# Altium PCB BMW E34 Touring Bagage Light 41x180mm.PcbDoc
Units mm, origin at the board's own origin, x right, y up, seen from the top; angles counter-clockwise.
Board outline 180 x 41 mm, 2 copper layers (Top Layer, Bottom Layer), stack 0.325 mm thick; 65 components, 46 nets, 172 pads, 168 vias.
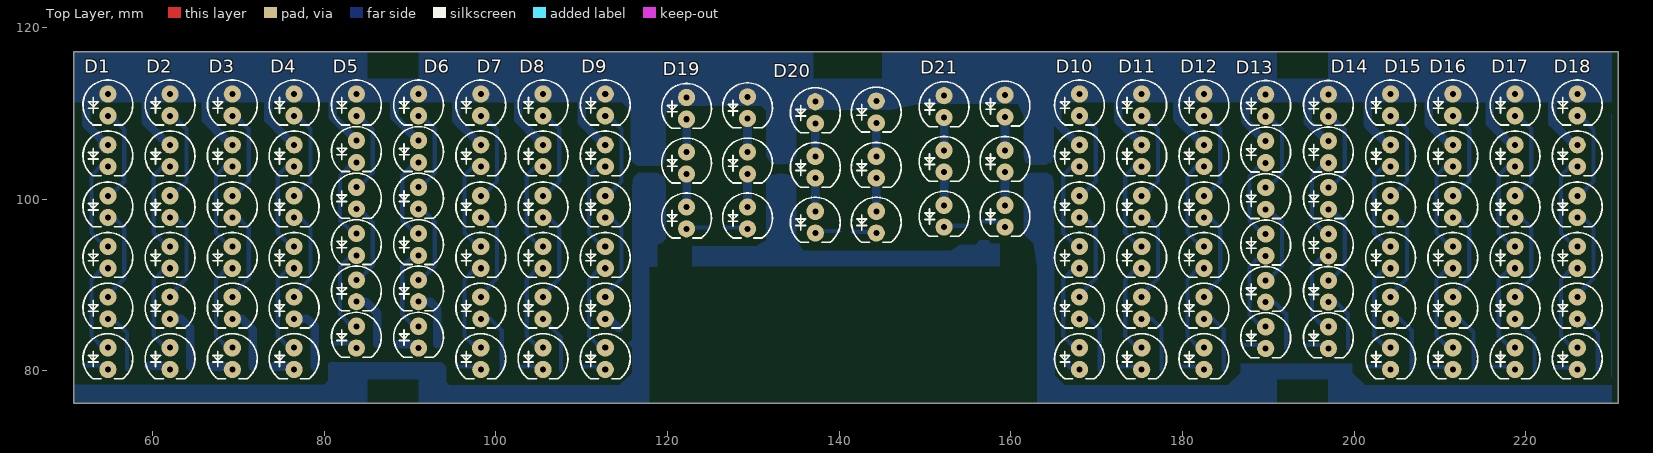
[diagram p0: Top Layer view]
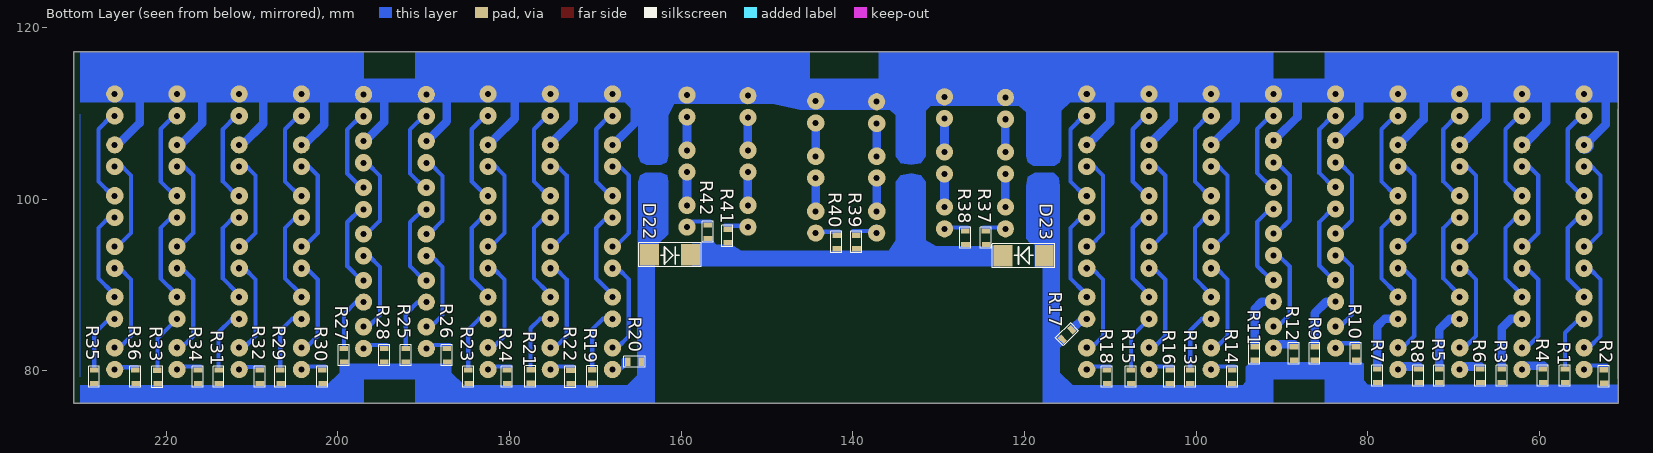
[diagram p1: Bottom Layer view, seen from below]

## Layer stack, top to bottom
Top Solder: solder mask 0.0102, Solder Resist, Dk 3.5
Top Layer: signal copper 0.0356
Dielectric 1: core 0.254, FR-4, Dk 4.2
Bottom Layer: signal copper 0.0356
Solder Side: solder mask 0.0102, Solder Resist, Dk 3.5

## Board outline
50.8,76.2 230.8,76.2 230.8,117.2 50.8,117.2

## Design rules (kind name [scope] priority, off if disabled: settings)
Clearance [All] p1: gap=0.5
ComponentClearance [All] p1: gap=0.001 collisioncheckmode=3 verticalgap=0.254 showdistances=FALSE
PolygonConnect [All] p1: connectstyle=Relief reliefconductorwidth=0.254 reliefentries=4 polygonreliefangle="90 Angle" airgapwidth=0.254
RoutingVias [All] p1: holewidth=0.7 width=2 viastyle="Through Hole" minholewidth=0.711 minwidth=1.27 maxholewidth=0.711 maxwidth=1.27
SolderMaskExpansion [All] p1: expansion=0.102
Width Width_lINES [(InNet('GND') OR InNet('VCC'))] p1 off: maxlimit=3 minlimit=0.1 preferedwidth=0.254 minimp=50.000000 maximp=50.000000 favimp=50.000000
Width [All] p2: maxlimit=2 minlimit=0.5 preferedwidth=1 minimp=50.000000 maximp=50.000000 favimp=50.000000
28 further rules are at their usual default settings.

## Components (designator, comment, footprint, x,y, rotation, side; value= is the part's Value field where it differs from the comment)
D1 "White" "LED Assembly Round 5mm White 6X 0.5mm" 54.8,112.25 r270 top
D2 "White" "LED Assembly Round 5mm White 6X 0.5mm" 62.05,112.25 r270 top
D3 "White" "LED Assembly Round 5mm White 6X 0.5mm" 69.3,112.25 r270 top
D4 "White" "LED Assembly Round 5mm White 6X 0.5mm" 76.5,112.25 r270 top
D5 "White" "LED Assembly Round 5mm White 6X" 83.75,112.25 r270 top
D6 "White" "LED Assembly Round 5mm White 6X" 91,112.25 r270 top
D7 "White" "LED Assembly Round 5mm White 6X 0.5mm" 98.25,112.25 r270 top
D8 "White" "LED Assembly Round 5mm White 6X 0.5mm" 105.5,112.25 r270 top
D9 "White" "LED Assembly Round 5mm White 6X 0.5mm" 112.75,112.25 r270 top
D10 "White" "LED Assembly Round 5mm White 6X 0.5mm" 168,112.25 r270 top
D11 "White" "LED Assembly Round 5mm White 6X 0.5mm" 175.25,112.25 r270 top
D12 "White" "LED Assembly Round 5mm White 6X 0.5mm" 182.5,112.25 r270 top
D13 "White" "LED Assembly Round 5mm White 6X" 189.7,112.2 r270 top
D14 "White" "LED Assembly Round 5mm White 6X" 197,112.2 r270 top
D15 "White" "LED Assembly Round 5mm White 6X 0.5mm" 204.25,112.25 r270 top
D16 "White" "LED Assembly Round 5mm White 6X 0.5mm" 211.5,112.25 r270 top
D17 "White" "LED Assembly Round 5mm White 6X 0.5mm" 218.75,112.25 r270 top
D18 "White" "LED Assembly Round 5mm White 6X 0.5mm" 226,112.25 r270 top
D19 "White" "LED Assembly Round 5mm White 2X3 1mm" 122.225,111.85 r0 top
D20 "White" "LED Assembly Round 5mm White 2X3 1mm" 137.225,111.35 r0 top
D21 "White" "LED Assembly Round 5mm White 2X3 1mm" 152.225,112.05 r0 top
D22 "S1M" DO-214AC 163.7,93.5 r180 bottom
D23 "S1M" DO-214AC 117.7,93.4 r0 bottom
R1 "160 Om" "SMD 0603 (1608)" 57.025,80.225 r270 bottom
R2 "160 Om" "SMD 0603 (1608)" 52.5,80.125 r270 bottom
R3 "160 Om" "SMD 0603 (1608)" 64.4,80.2 r270 bottom
R4 "160 Om" "SMD 0603 (1608)" 59.6,80.2 r270 bottom
R5 "160 Om" "SMD 0603 (1608)" 71.7,80.2 r270 bottom
R6 "160 Om" "SMD 0603 (1608)" 66.9,80.2 r270 bottom
R7 "160 Om" "SMD 0603 (1608)" 78.9,80.2 r270 bottom
R8 "160 Om" "SMD 0603 (1608)" 74.1,80.2 r270 bottom
R9 "160 Om" "SMD 0603 (1608)" 86.2,82.8 r270 bottom
R10 "160 Om" "SMD 0603 (1608)" 81.4,82.8 r270 bottom
R11 "160 Om" "SMD 0603 (1608)" 93.2,82.8 r270 bottom
R12 "160 Om" "SMD 0603 (1608)" 88.6,82.8 r270 bottom
R13 "160 Om" "SMD 0603 (1608)" 100.7,80.1 r270 bottom
R14 "160 Om" "SMD 0603 (1608)" 95.8,80.1 r270 bottom
R15 "160 Om" "SMD 0603 (1608)" 107.6,80.1 r270 bottom
R16 "160 Om" "SMD 0603 (1608)" 103.1,80.1 r270 bottom
R17 "160 Om" "SMD 0603 (1608)" 114.5,84.8 r315 bottom
R18 "160 Om" "SMD 0603 (1608)" 110.4,80.1 r270 bottom
R19 "160 Om" "SMD 0603 (1608)" 170.375,80.125 r270 bottom
R20 "160 Om" "SMD 0603 (1608)" 166.225,81.05 r180 bottom
R21 "160 Om" "SMD 0603 (1608)" 177.55,80.125 r270 bottom
R22 "160 Om" "SMD 0603 (1608)" 172.9,80.075 r270 bottom
R23 "160 Om" "SMD 0603 (1608)" 184.8,80.1 r270 bottom
R24 "160 Om" "SMD 0603 (1608)" 180.3,80.1 r270 bottom
R25 "160 Om" "SMD 0603 (1608)" 192.1,82.6 r270 bottom
R26 "160 Om" "SMD 0603 (1608)" 187.3,82.6 r270 bottom
R27 "160 Om" "SMD 0603 (1608)" 199.3,82.6 r270 bottom
R28 "160 Om" "SMD 0603 (1608)" 194.6,82.6 r270 bottom
R29 "160 Om" "SMD 0603 (1608)" 206.7,80.1 r270 bottom
R30 "160 Om" "SMD 0603 (1608)" 201.8,80.1 r270 bottom
R31 "160 Om" "SMD 0603 (1608)" 213.9,80.1 r270 bottom
R32 "160 Om" "SMD 0603 (1608)" 209.1,80.1 r270 bottom
R33 "160 Om" "SMD 0603 (1608)" 221.025,80.075 r270 bottom
R34 "160 Om" "SMD 0603 (1608)" 216.3,80.1 r270 bottom
R35 "160 Om" "SMD 0603 (1608)" 228.4,80.1 r270 bottom
R36 "160 Om" "SMD 0603 (1608)" 223.6,80.1 r270 bottom
R37 "160 Om" "SMD 0603 (1608)" 124.5,96.3 r270 bottom
R38 "160 Om" "SMD 0603 (1608)" 126.9,96.3 r270 bottom
R39 "160 Om" "SMD 0603 (1608)" 139.6,95.8 r270 bottom
R40 "160 Om" "SMD 0603 (1608)" 141.9,95.8 r270 bottom
R41 "160 Om" "SMD 0603 (1608)" 154.6,96.5 r270 bottom
R42 "160 Om" "SMD 0603 (1608)" 156.9,97 r270 bottom

## Footprints (in the part's own frame and the unit in brackets; to place one, negate y for a bottom-side part, rotate by r counter-clockwise, add the part's x,y. Pads: shape width x height; smd on the part's side, far side on the other; paste and mask are expansions set on the pad)
DO-214AC [mm]
  rect 2.2x2.5 smd: A(0,0) K(4.8,0)
  silkscreen extent -1.25,-1.4 6.05,1.4, body extent -0.42,-1.4 5.08,1.4, height 2.6
"LED Assembly Round 5mm White 2X3 1mm" [mm] "Assembly 2x3 in one line, distance 1mm"
  round 2 hole 0.7: A1(0,0) A2(7.1,0.08) K1(0,-15.3) K2(7.1,-15.3)
  Bottom Layer lines w0.5: 0,-12.76 0.24,-12.76 ; 0,-8.9 0.4,-8.9 ; 0,-6.36 0.24,-6.36 ; 0,-2.54 0.34,-2.54 ; 6.5,-8.9 7.1,-8.9 ; 6.56,-12.76 7.1,-12.76 ; 6.74,-2.46 7.1,-2.46 ; 6.76,-6.36 7.1,-6.36
  Bottom Layer lines w1: 0,-12.76 0,-8.9 ; 0,-6.36 0,-2.54 ; 7.1,-12.76 7.1,-8.9 ; 7.1,-6.36 7.1,-2.46
  silkscreen extent -2.9,-16.36 10,1.7, body extent -3.01,-16.47 10.11,1.79, height 9.31
"LED Assembly Round 5mm White 6X" [mm] "Assembly 6X in one line"
  round 2 hole 0.7: A1(0,0) A2(5.42,0) K1(24.2,0) K2(29.6,0)
  Bottom Layer lines w0.5: 27.06,0 27.06,-0.54 25.7,-1.9 20.1,-1.9 18.8,-0.6 18.8,0 ; 21.66,0 21.66,0.24 20,1.9 14.9,1.9 13.4,0.4 13.4,0 ; 16.26,0 16.26,-0.34 14.7,-1.9 9.5,-1.9 7.96,-0.36 7.96,0 ; 10.86,0 10.86,0.24 9.2,1.9 4.1,1.9 2.54,0.34 2.54,0
  silkscreen extent -1.62,-2.9 30.66,2.9, body extent -1.71,-3.01 30.77,3.01, height 9.31
"LED Assembly Round 5mm White 6X 0.5mm" [mm] "Assembly 6X in one line, distance 0.5mm"
  round 2 hole 0.7: A1(0,0) A2(5.92,0) K1(26.2,0) K2(32.1,0)
  Bottom Layer lines w0.5: 8.46,-0.36 8.46,0 ; 7.96,-0.36 9.5,-1.9 16.2,-1.9 17.76,-0.34 17.76,0 ; 29.56,0 29.56,-0.54 28.2,-1.9 21.6,-1.9 20.3,-0.6 20.3,0 ; 23.66,0 23.66,0.24 ; 14.4,0 14.4,0.4 ; 11.86,0 11.86,0.24 10.2,1.9 4.1,1.9 2.54,0.34 2.54,0 ; 23.16,0.24 21.5,1.9 15.6,1.9 14.1,0.4
  silkscreen extent -1.62,-2.9 33.16,2.9, body extent -1.71,-3.01 33.27,3.01, height 9.31
"SMD 0603 (1608)" [mm]
  rect 0.6x1 smd: 1(0,0) 2(1.575,0.025)
  silkscreen extent -0.45,-0.65 2.02,0.63, body extent 0.03,-0.4 1.58,0.45, height 0.45

## Part data
D1 D2 D3 D4 D5 D6 D7 D8 D9 D10 D11 D12 D13 D14 D15 D16 D17 D18 D19 D20 D21: library part "Led Assembly Round 5mm White 6X", "3.2-3.4v 25mA, 16-20cd"
D22 D23: library part "Diode S1M", "1 Amp General Purpose Rectifier"
R1 R2 R3 R4 R5 R6 R7 R8 R9 R10 R11 R12 R13 R14 R15 R16 R17 R18 R19 R20 R21 R22 R23 R24 R25 R26 R27 R28 R29 R30 R31 R32 R33 R34 R35 R36 R37 R38 R39 R40 R41 R42: library part "Res SMD 0603"

## Via types
v1: diameter 2, hole 0.7, Top Layer to Bottom Layer, 168 vias

## Nets (pads, with @x,y where several pads share a name; then routed paths per layer and width w, separated by ;. In a path a pad name is that pad's centre, name@x,y a point inside that pad or via, vN(x,y) a via of type N, cw(c..) or ccw(c..) an arc to the next point about the centre after c; other vN are vias at no path point)
GND: D22.K D23.K R37.2 R38.2 R39.2 R40.2 R41.2 R42.2
LEFTGND: D23.A R1.2 R2.2 R3.2 R4.2 R5.2 R6.2 R7.2 R8.2 R9.2 R10.2 R11.2 R12.2 R13.2 R14.2 R15.2 R16.2 R17.2 R18.2
NetD1_K1: D1.K1 R1.1 | length 6.5
  Bottom Layer w0.5: D1.K1@55.4,86.05 57.025,84.425 R1.1
NetD1_K2: D1.K2 R2.1 | length 2.6
  Bottom Layer w0.5: 52.2,80.625 D1.K2@54.8,80.625
NetD2_K1: D2.K1 R3.1 | length 7.3
  Bottom Layer w1: D2.K1 63.35,86.05 64.4,85 R3.1@64.4,80.5
NetD2_K2: D2.K2 R4.1 | length 2.4
  Bottom Layer w1: 59.5,80.6 D2.K2@61.9,80.6
NetD3_K1: D3.K1 R5.1 | length 7.2
  Bottom Layer w1: D3.K1 70.45,86.05 71.7,84.8 R5.1@71.7,80.5
NetD3_K2: D3.K2 R6.1 | length 2.3
  Bottom Layer w1: R6.1@66.9,80.5 D3.K2@69.25,80.5
NetD4_K1: D4.K1 R7.1 | length 7.5
  Bottom Layer w1: D4.K1 78.05,86.05 78.9,85.2 R7.1@78.9,80.5
NetD4_K2: D4.K2 R8.1 | length 2.4
  Bottom Layer w1: R8.1@74.1,80.5 D4.K2@76.45,80.5
NetD5_K1: D5.K1 R9.1 | length 6.6
  Bottom Layer w1: D5.K1 84.85,88.05 86.2,86.7 R9.1@86.2,83.1
NetD5_K2: D5.K2 R10.1 | length 2.8
  Bottom Layer w0.5: 81.1,83.2 D5.K2@83.9,83.2
NetD6_K1: D6.K1 R11.1 | length 6.7
  Bottom Layer w1: D6.K1 92.35,88.05 93.2,87.2 R11.1@93.2,83.1
NetD6_K2: D6.K2 R12.1 | length 2.3
  Bottom Layer w1: 88.6,83.1 D6.K2@90.85,83.1
NetD7_K1: D7.K1 R13.1 | length 7.6
  Bottom Layer w0.5: D7.K1 99.35,86.05 100.7,84.7 R13.1
NetD7_K2: D7.K2 R14.1 | length 2.9
  Bottom Layer w0.5: 95.5,80.5 96.2,80.5 97.9,80.5 D7.K2
NetD8_K1: D8.K1 R15.1 | length 6.8
  Bottom Layer w0.5: D8.K1 107.6,83.95 R15.1
NetD8_K2: D8.K2 R16.1 | length 2.8
  Bottom Layer w0.5: 102.8,80.5 103.5,80.5 105.15,80.5 D8.K2
NetD9_K1: D9.K1 R17.1 | length 1.6
  Bottom Layer w1: D9.K1@113.25,86.05 R17.1@114.35,84.95
NetD9_K2: D9.K2 R18.1 | length 2.8
  Bottom Layer w0.5: 110.1,80.5 110.8,80.5 112.4,80.5 D9.K2
NetD10_K1: D10.K1 R19.1 | length 7.6
  Bottom Layer w0.5: D10.K1 169.15,86.05 170.375,84.825 R19.1
NetD10_K2: D10.K2 R20.1 | length 2.2
  Bottom Layer w0.5: 166.7,81.3 166.7,80.575 167.125,80.15 D10.K2
NetD11_K1: D11.K1 R21.1 | length 7.6
  Bottom Layer w0.5: D11.K1 176.45,86.05 177.55,84.95 R21.1
NetD11_K2: D11.K2 R22.1 | length 2.8
  Bottom Layer w0.5: 172.6,80.5 173.325,80.5 174.9,80.5 D11.K2
NetD12_K1: D12.K1 R23.1 | length 7.5
  Bottom Layer w0.5: D12.K1 183.55,86.05 184.8,84.8 R23.1
NetD12_K2: D12.K2 R24.1 | length 2.7
  Bottom Layer w0.5: 179.9,80.5 180.7,80.5 182.15,80.5 D12.K2
NetD13_K1: D13.K1 R25.1 | length 7
  Bottom Layer w0.5: D13.K1 190.7,88 192.1,86.6 R25.1
NetD13_K2: D13.K2 R26.1 | length 2.4
  Bottom Layer w0.5: 187,83 D13.K2@189.4,83
NetD14_K1: D14.K1 R27.1 | length 6.9
  Bottom Layer w0.5: D14.K1 197.9,88 199.3,86.6 R27.1
NetD14_K2: D14.K2 R28.1 | length 2.4
  Bottom Layer w0.5: 194.3,83 D14.K2@196.7,83
NetD15_K1: D15.K1 R29.1 | length 7.6
  Bottom Layer w0.5: D15.K1 205.35,86.05 206.7,84.7 R29.1
NetD15_K2: D15.K2 R30.1 | length 2.9
  Bottom Layer w0.5: 201.5,80.5 202.2,80.5 203.9,80.5 D15.K2
NetD16_K1: D16.K1 R31.1 | length 7.4
  Bottom Layer w0.5: D16.K1 212.35,86.05 213.9,84.5 R31.1
NetD16_K2: D16.K2 R32.1 | length 2.8
  Bottom Layer w0.5: 208.85,80.45 211.1,80.45 211.45,80.1 D16.K2
NetD17_K1: D17.K1 R33.1 | length 6.9
  Bottom Layer w0.5: D17.K1 221.025,83.775 R33.1
NetD17_K2: D17.K2 R34.1 | length 2.9
  Bottom Layer w0.5: 216,80.5 216.7,80.5 218.4,80.5 D17.K2
NetD18_K1: D18.K1 R35.1 | length 7.3
  Bottom Layer w0.5: D18.K1 226.65,86.05 228.4,84.3 R35.1
NetD18_K2: D18.K2 R36.1 | length 2.7
  Bottom Layer w0.5: 223.4,80.4 223.9,80.4 225.75,80.4 D18.K2
NetD19_K1: D19.K1 R37.1 | length 2.6
  Bottom Layer w0.5: D19.K1 122.375,96.7 124.1,96.7 124.8,96.7
NetD19_K2: D19.K2 R38.1 | length 2.8
  Bottom Layer w0.5: 126.6,96.7 127.3,96.7 129.175,96.7 D19.K2
NetD20_K1: D20.K1 R39.1 | length 2.9
  Bottom Layer w0.5: D20.K1 137.475,96.3 139.1,96.3 140,96.3
  Bottom Layer w0.6: D20.K1@137.275,96.725 D20.K1@137.3,96.7
NetD20_K2: D20.K2 R40.1 | length 2.8
  Bottom Layer w0.5: 141.6,96.2 142.3,96.2 144.175,96.2 D20.K2
NetD21_K1: D21.K1 R41.1 | length 2.7
  Bottom Layer w0.5: D21.K1 152.375,96.9 154.2,96.9 154.9,96.9
NetD21_K2: D21.K2 R42.1 | length 3
  Bottom Layer w0.5: 156.6,97.4 157.3,97.4 158.675,97.4 D21.K2
RIGHTGND: D22.A R19.2 R20.2 R21.2 R22.2 R23.2 R24.2 R25.2 R26.2 R27.2 R28.2 R29.2 R30.2 R31.2 R32.2 R33.2 R34.2 R35.2 R36.2
VCC: D1.A1 D1.A2 D2.A1 D2.A2 D3.A1 D3.A2 D4.A1 D4.A2 D5.A1 D5.A2 D6.A1 D6.A2 D7.A1 D7.A2 D8.A1 D8.A2 D9.A1 D9.A2 D10.A1 D10.A2 D11.A1 D11.A2 D12.A1 D12.A2 D13.A1 D13.A2 D14.A1 D14.A2 D15.A1 D15.A2 D16.A1 D16.A2 D17.A1 D17.A2 D18.A1 D18.A2 D19.A1 D19.A2 D20.A1 D20.A2 D21.A1 D21.A2 | length 126.9
  Bottom Layer w1: 52.3,112.4 52.3,108.674 D1.A2@54.644,106.33 ; 59.2,112.7 59.2,108.974 D2.A2@61.544,106.63 ; 66.2,113 66.2,109.274 D3.A2@68.544,106.93 ; 73.5,113 73.5,109.274 D4.A2@75.844,106.93 ; 81,113.3 81,109.574 D5.A2@83.344,107.23 ; 88.2,113.3 88.2,109.574 D6.A2@90.544,107.23 ; 95.4,112.9 95.4,109.174 D7.A2@97.744,106.83 ; 102.6,113 102.6,109.274 D8.A2@104.944,106.93 ; 110,112.7 110,108.974 D9.A2@112.344,106.63 ; 165.4,112.6 165.4,108.874 D10.A2@167.744,106.53 ; 172.5,112.9 172.5,109.174 D11.A2@174.844,106.83 ; 179.4,113.1 179.4,109.374 181.744,107.03 ; 187.3,112.8 187.3,109.074 D13.A2@189.644,106.73 ; 194.6,112.7 194.6,108.974 D14.A2@196.944,106.63 ; 201.6,112.4 201.6,108.674 D15.A2@203.944,106.33 ; 208.7,112.5 208.7,108.774 D16.A2@211.044,106.43 ; 215.8,112.6 215.8,108.874 D17.A2@218.144,106.53 ; 223.1,112.6 223.1,108.874 D18.A2@225.444,106.53
  Bottom Layer w2: D1.A2@54.644,106.33 D1.A2
copper on no net: | length 62
  Bottom Layer w0.1: 50.9,79.1 50.9,110.5 ; 230,79.3 230,109.9
  other v1: 54.8,82.69 62.05,82.69 69.3,82.69 76.5,82.69 98.25,82.69 105.5,82.69 112.75,82.69 168,82.69 175.25,82.69 182.5,82.69 204.25,82.69 211.5,82.69 218.75,82.69 226,82.69 189.7,85.14 197,85.14 83.75,85.19 91,85.19 54.8,88.59 62.05,88.59 69.3,88.59 76.5,88.59 98.25,88.59 105.5,88.59 112.75,88.59 168,88.59 175.25,88.59 182.5,88.59 204.25,88.59 211.5,88.59 218.75,88.59 226,88.59 189.7,90.54 197,90.54 83.75,90.59 91,90.59 54.8,91.95 62.05,91.95 69.3,91.95 76.5,91.95 98.25,91.95 105.5,91.95 112.75,91.95 168,91.95 175.25,91.95 182.5,91.95 204.25,91.95 211.5,91.95 218.75,91.95 226,91.95 189.7,93.4 197,93.4 83.75,93.45 91,93.45 54.8,94.49 62.05,94.49 69.3,94.49 76.5,94.49 98.25,94.49 105.5,94.49 112.75,94.49 168,94.49 175.25,94.49 182.5,94.49 204.25,94.49 211.5,94.49 218.75,94.49 226,94.49 189.7,95.94 197,95.94 83.75,95.99 91,95.99 54.8,97.85 62.05,97.85 69.3,97.85 76.5,97.85 98.25,97.85 105.5,97.85 112.75,97.85 168,97.85 175.25,97.85 182.5,97.85 204.25,97.85 211.5,97.85 218.75,97.85 226,97.85 137.225,98.59 144.325,98.59 189.7,98.8 197,98.8 83.75,98.85 91,98.85 122.225,99.09 129.325,99.09 152.225,99.29 159.325,99.29 54.8,100.39 62.05,100.39 69.3,100.39 76.5,100.39 98.25,100.39 105.5,100.39 112.75,100.39 168,100.39 175.25,100.39 182.5,100.39 204.25,100.39 211.5,100.39 218.75,100.39 226,100.39 189.7,101.34 197,101.34 83.75,101.39 91,101.39 137.225,102.45 144.325,102.45 122.225,102.95 129.325,102.95 152.225,103.15 159.325,103.15 54.8,103.79 62.05,103.79 69.3,103.79 76.5,103.79 98.25,103.79 105.5,103.79 112.75,103.79 168,103.79 175.25,103.79 182.5,103.79 204.25,103.79 211.5,103.79 218.75,103.79 226,103.79 189.7,104.24 197,104.24 83.75,104.29 91,104.29 137.225,104.99 144.325,104.99 122.225,105.49 129.325,105.49 152.225,105.69 159.325,105.69 137.225,108.81 144.325,108.89 122.225,109.31 129.325,109.39 152.225,109.51 159.325,109.59 189.7,109.66 197,109.66 54.8,109.71 62.05,109.71 69.3,109.71 76.5,109.71 83.75,109.71 91,109.71 98.25,109.71 105.5,109.71 112.75,109.71 168,109.71 175.25,109.71 182.5,109.71 204.25,109.71 211.5,109.71 218.75,109.71 226,109.71

## Other copper
Bottom Layer:
  region net VCC: 50.9,117.1 85,117.1 85,114 91,114 91,117.1 137,117.1 137,114 145,114 145,117.1 191,117.1 191,114 197,114 197,117.1 230,117.1 230,111.3 166.6,111.3 165,109.7 165,105 164.7,104.3 164.1,104 162.3,104 161.7,104.3 161.5,105 161.5,109.7 160.8,111.1 149.4,111.1 146.2,110.4 135.7,110.4 135,109.8 135,105 134.4,104.2 133.2,104 132.1,104.2 131.5,105 131.5,110.3 130.9,110.9 120.7,110.9 119.8,110.1 119.8,105 119.6,104.3 119,103.9 116.5,103.9 115.9,104.3 115.7,105 115.7,110.3 114.7,111.3 50.9,111.3
  region net LEFTGND: 85,79 85,76.3 50.8,76.3 50.8,78.4 80,78.4 80.5,78.9 80.5,80.8 80.7,81 93.7,81 94.2,80.5 94.2,78.7 94.6,78.3 114.4,78.3 115.9,79.8 115.9,82.7 115.4,83.2 115.9,83.7 115.9,101.5 116,102.5 116.6,103.1 118.8,103.1 119.6,102.6 119.8,101.5 119.8,95.4 119.4,94.9 118.8,94.7 118.8,92.1 117.9,92.1 117.9,76.3 91,76.3 91,79
  region net RIGHTGND: 163.1,92.1 162.7,94.8 161.5,95.9 161.5,102 161.6,102.8 162.3,103.1 164.2,103.1 164.8,102.8 165,102 165.1,79.5 166.3,78.3 185.3,78.3 186.8,79.8 186.8,80.8 199.8,80.8 199.8,79.8 201.3,78.3 230,78.3 230,76.3 197,76.3 197,79 191,79 191,76.3 163.1,76.3 163.1,92.1
  region net GND: 122.9,92.1 122.9,94.6 124,94.5 130.3,94.5 131.5,95.2 131.5,102 132.1,102.8 133.2,103 134.4,102.8 135,102 135,95.2 135.8,94 153,94 154.1,94.7 155.9,94.7 156.4,95.2 157.4,95.2 157.7,94.8 158.7,94.8 158.7,92.2
Multi-Layer:
  pour cut-out: 118,76 118,91.8 163,91.8 163,76

## Silkscreen, mask and mechanical layers (free items; w line width, h text height)
Drill Drawing:
  text ".LEGEND" at 235.88,81.28 h1.52
  text "Drill Drawing." at 235.88,78.74 h1.52

## Dimensions
50.8,76.2 to 50.8,117.2 on Mechanical 1
50.8,76.2 to 230.8,76.2 on Mechanical 1